# Altium PCB PCB1.pcbdoc
Units mil, origin at the board's own origin, x right, y up, seen from the top; angles counter-clockwise.
Board outline 1889.76 x 1889.47 mil, 2 copper layers (Top Layer, Bottom Layer); 3 components, 11 nets, 10 pads, 30 vias.
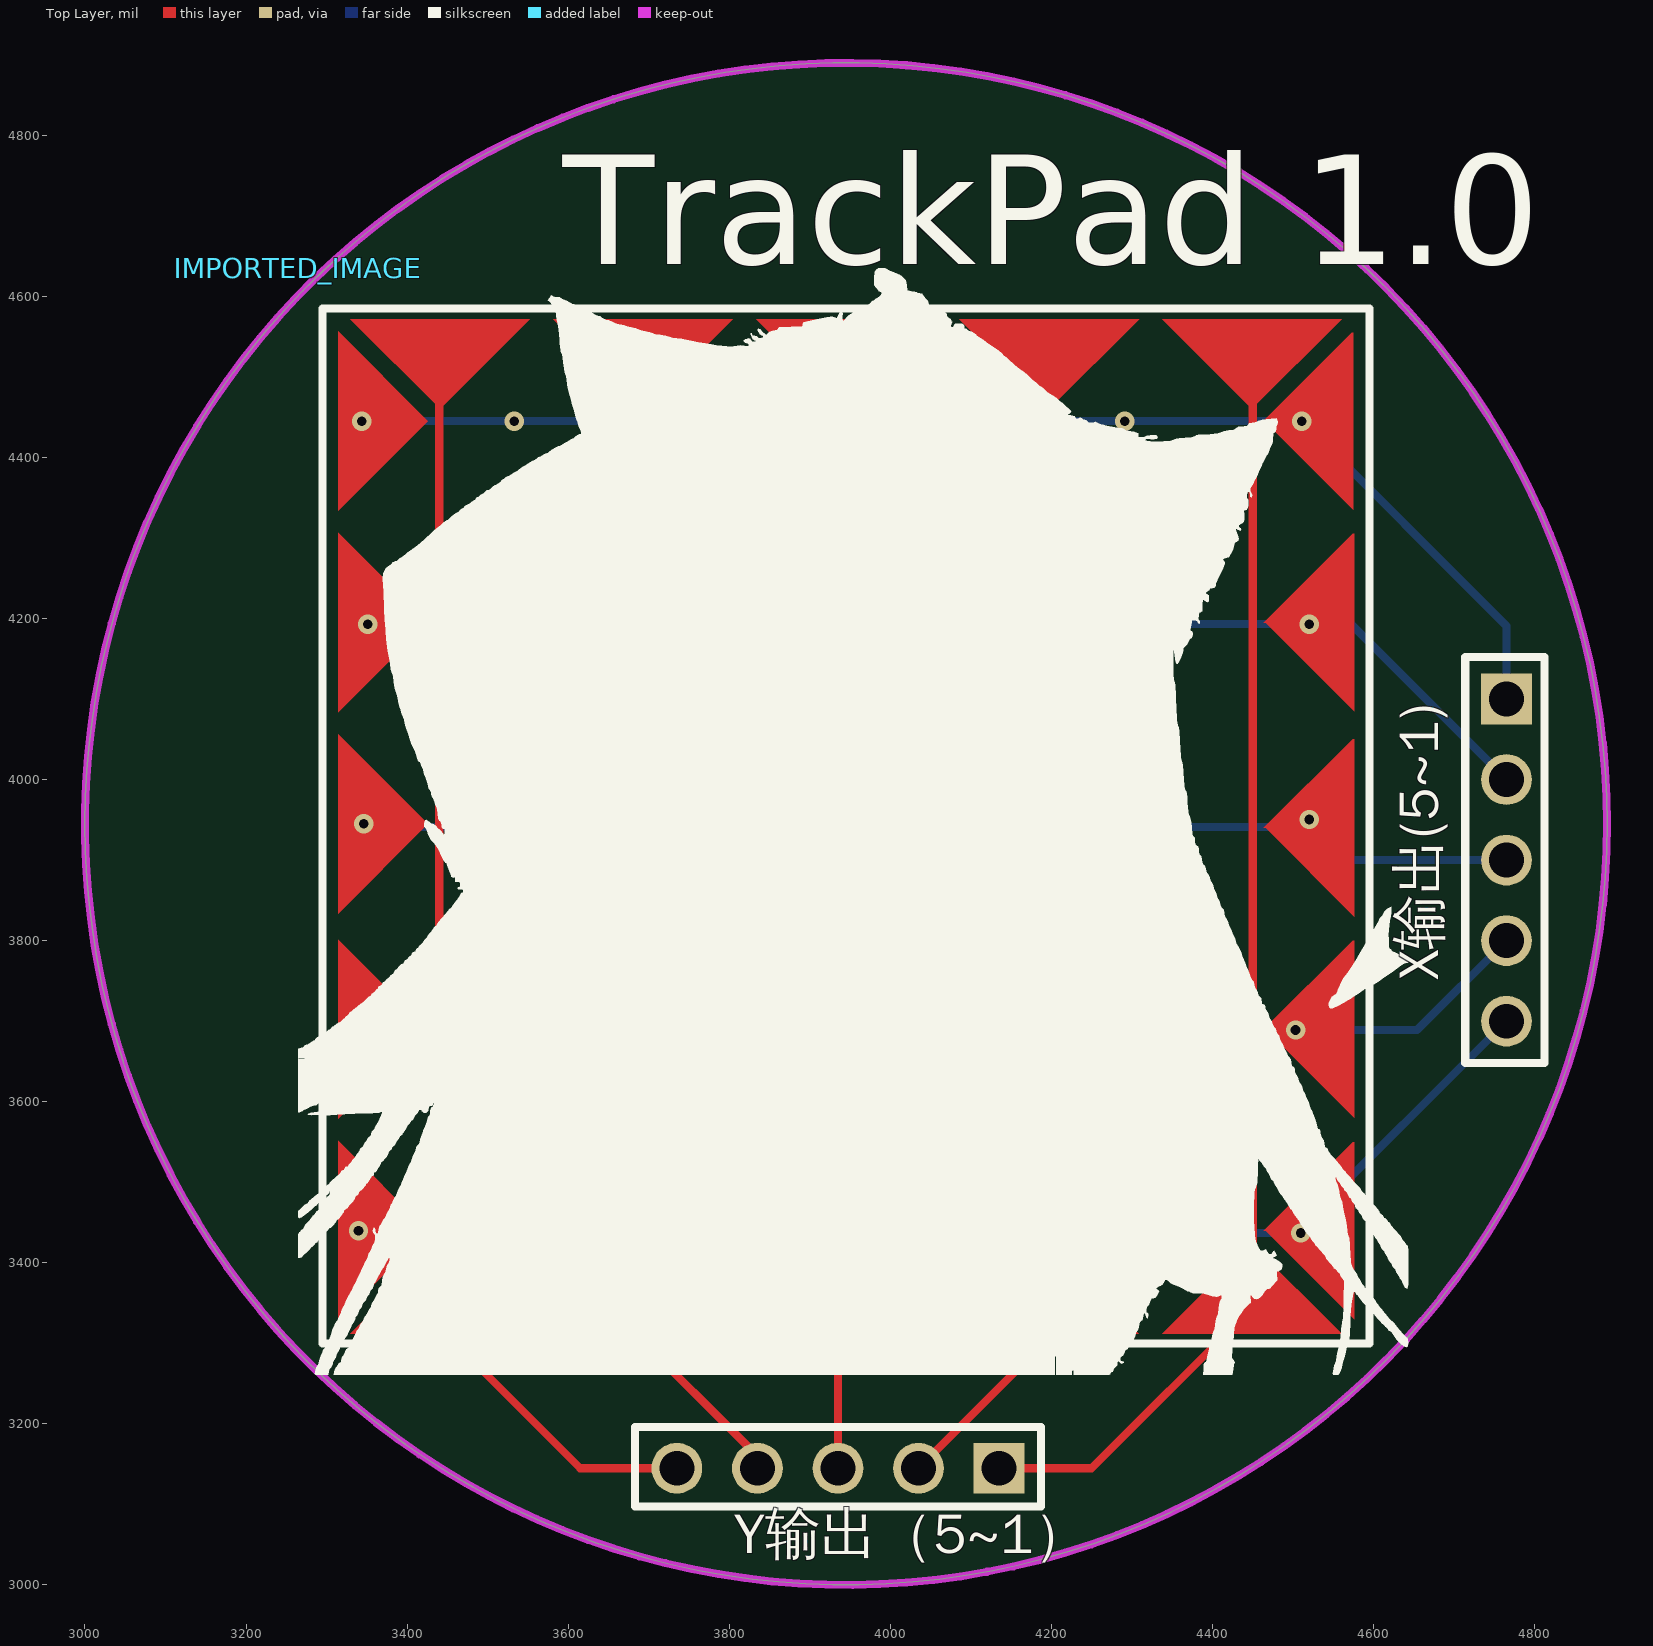
[diagram p0: Top Layer view]
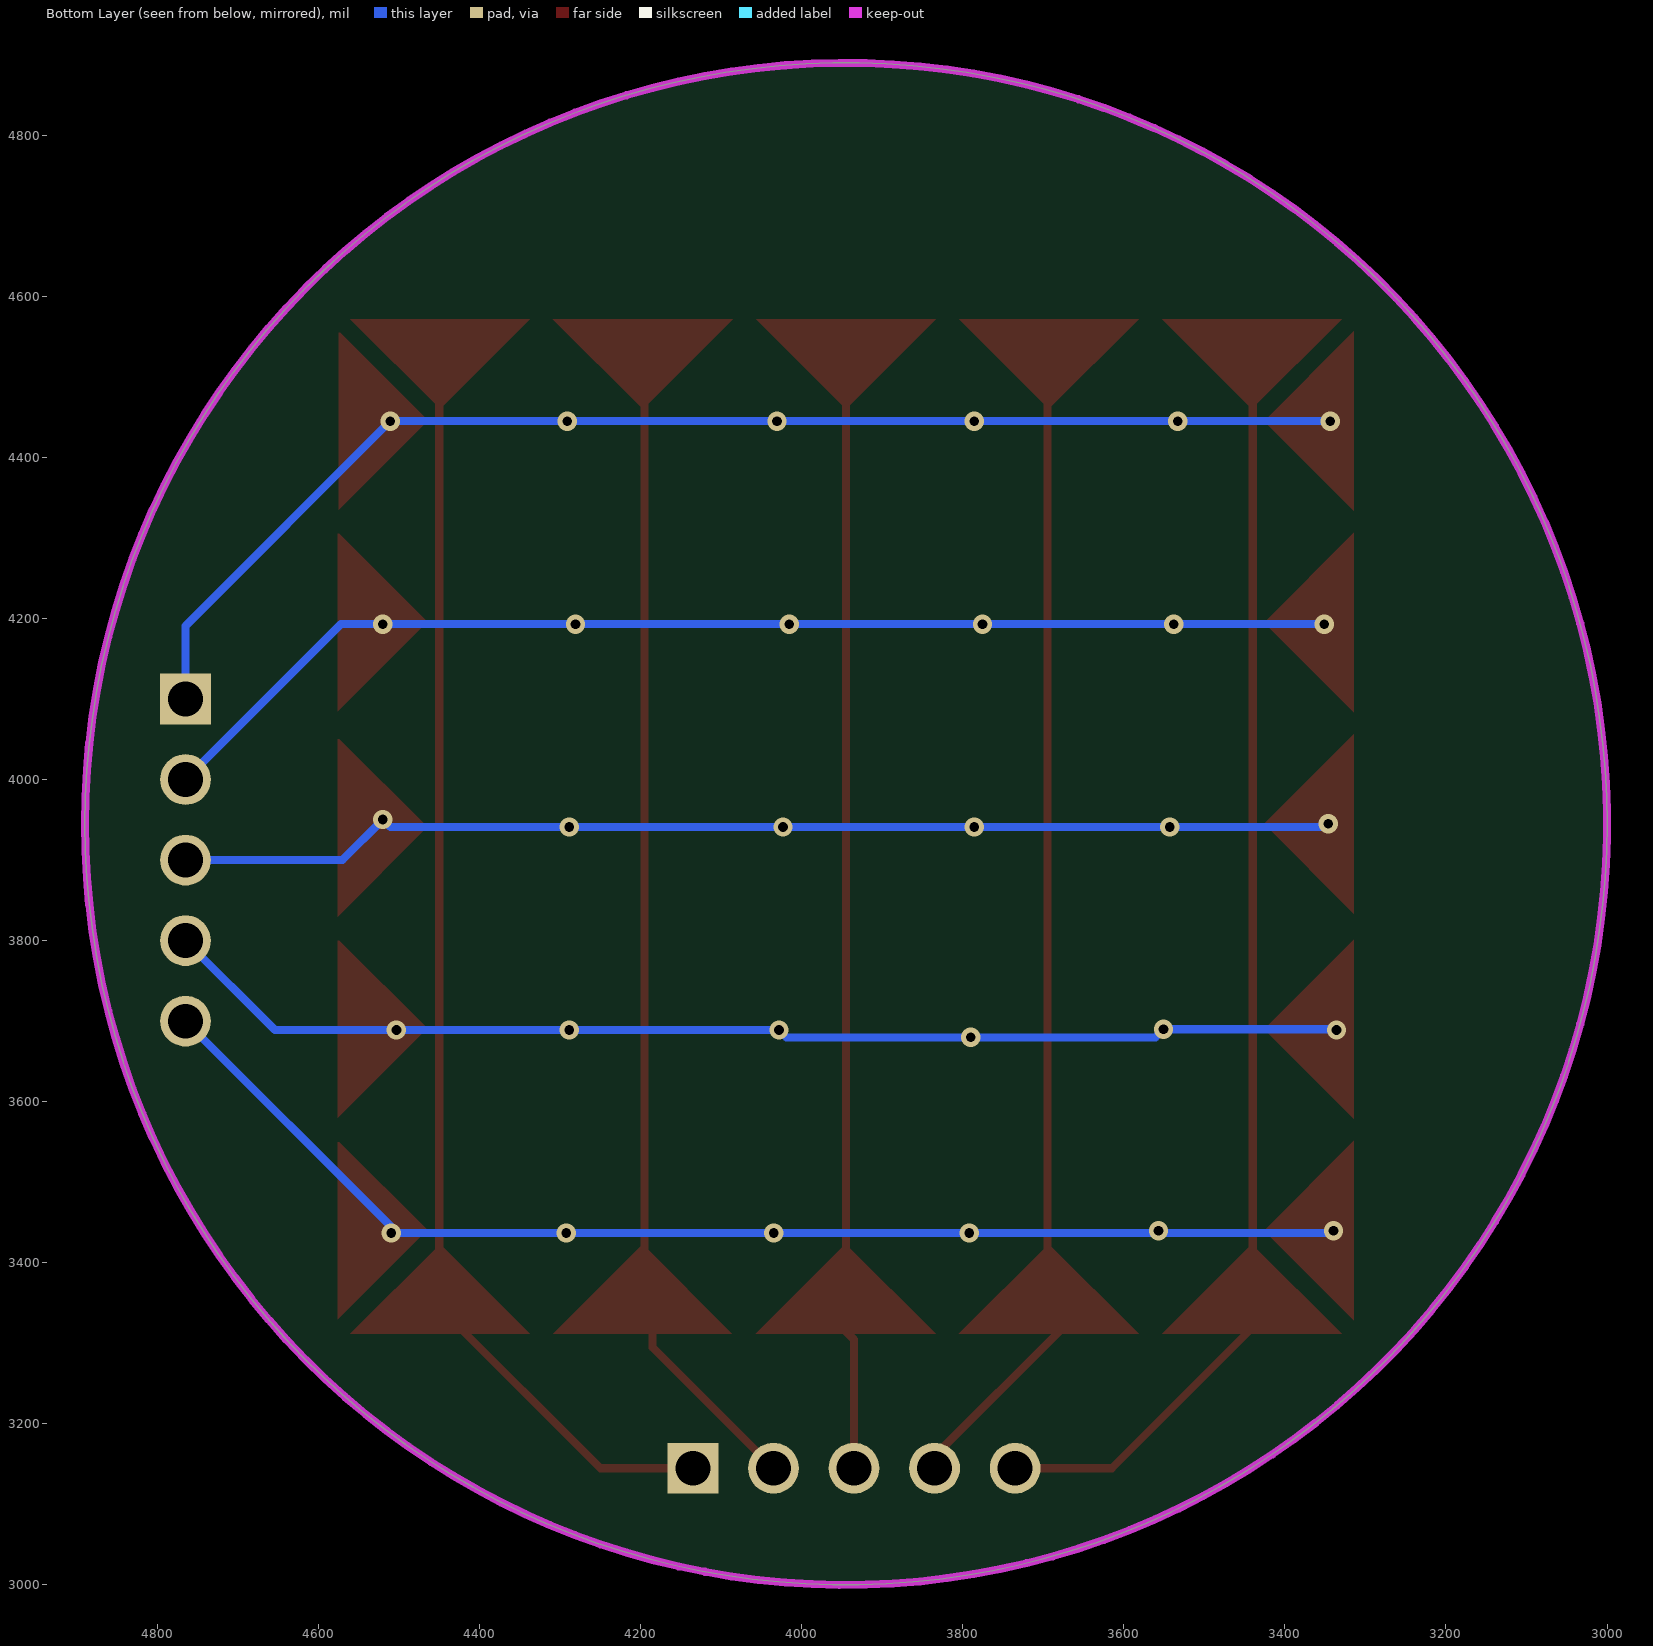
[diagram p1: Bottom Layer view, seen from below]

## Layer stack, top to bottom
Top Layer: signal copper (thickness not stored)
Dielectric: dielectric 12.6, FR-4, Dk 4.8
Bottom Layer: signal copper (thickness not stored)

## Board outline
4889.76,3944.88 ccw(c3944.88,3944.88) 3000,3944.88 ccw(c3944.88,3944.88)

## Components (designator, comment, footprint, x,y, rotation, side; value= is the part's Value field where it differs from the comment)
IMPORTED_IMAGE "IMPORTED_IMAGE" IMPORTED_IMAGE 3264.88,4634.88 r0 top
X输出(5~1) "双塑单排排针5PIN2.54间距" HDR-TH_5P-P2.54-V-M-A 4764.88,3899.88 r270 top
Y输出（5~1） "双塑单排排针5PIN2.54间距" HDR-TH_5P-P2.54-V-M-A 3934.88,3144.88 r180 top

## Footprints (in the part's own frame and the unit in brackets; to place one, negate y for a bottom-side part, rotate by r counter-clockwise, add the part's x,y. Pads: shape width x height; smd on the part's side, far side on the other; paste and mask are expansions set on the pad)
HDR-TH_5P-P2.54-V-M-A [mm]
  rect 1.6x1.6 hole 1.1: 1(-5.08,0)
  round 1.6 hole 1.1: 2(-2.54,0) 3(0,0) 4(2.54,0) 5(5.08,0)
  silkscreen extent -6.4,-1.3 6.4,1.2
IMPORTED_IMAGE [mil]
  silkscreen extent 0,-1374 1378,0

## Via types
v1: diameter 24.02, hole 12.01, Top Layer to Bottom Layer, 30 vias

## Nets (pads, with @x,y where several pads share a name; then routed paths per layer and width w, separated by ;. In a path a pad name is that pad's centre, name@x,y a point inside that pad or via, vN(x,y) a via of type N, cw(c..) or ccw(c..) an arc to the next point about the centre after c; other vN are vias at no path point)
BOT_OUT1: Y输出（5~1）.1 | length 1485.8
  Top Layer w10: Y输出（5~1）.1 4249.88,3144.88 4444.88,3339.88 ; 4449.88,3384.88 4449.88,4479.88
BOT_OUT2: Y输出（5~1）.2 | length 1332.1
  Top Layer w10: Y输出（5~1）.2 4184.88,3294.88 4184.88,3339.88 ; 4194.88,3399.88 4194.88,4474.88
BOT_OUT3: Y输出（5~1）.3 | length 1305.4
  Top Layer w10: Y输出（5~1）.3 3934.88,3304.88 3954.88,3324.88 ; 3939.88,3359.88 3944.88,3364.88 3944.88,4474.88
BOT_OUT4: Y输出（5~1）.4 | length 1323.3
  Top Layer w10: 3674.88,3319.88 3834.88,3159.88 Y输出（5~1）.4 ; 3689.88,3404.88 3694.88,3409.88 3694.88,4484.88
BOT_OUT5: Y输出（5~1）.5 | length 1479.6
  Top Layer w10: 3434.88,3324.88 3614.88,3144.88 Y输出（5~1）.5 ; 3439.88,3384.88 3439.88,4489.88
TOP_OUT1: X输出(5~1).1 | length 1617.4
  Bottom Layer w10: v1(3343.51,4444.88) v1(3532.97,4444.88) v1(3785.6,4444.88) v1(4030.64,4444.88) v1(4290.85,4444.88) v1(4510.63,4444.88) 4764.88,4190.63 4764.88,4099.88
TOP_OUT2: X输出(5~1).2 | length 1493.8
  Bottom Layer w10: v1(3351.09,4192.91) v1(3538.03,4192.91) v1(3775.49,4192.91) v1(4015.49,4192.91) v1(4280.74,4192.91) v1(4519.88,4192.91) 4571.85,4192.91 4764.88,3999.88
TOP_OUT3: X输出(5~1).3 | length 1445.2
  Bottom Layer w10: v1(3346.03,3944.88) 3349.97,3940.94 v1(3543.08,3940.94) v1(3785.6,3940.94) v1(4023.07,3940.94) v1(4288.32,3940.94) 4510.56,3940.94 v1(4519.88,3950.26) 4570.26,3899.88 4764.88,3899.88
TOP_OUT4: X输出(5~1).4 | length 1483.2
  Bottom Layer w10: v1(3335.93,3688.98) 3336.83,3689.88 v1(3550.66,3689.88) 3560.66,3679.88 v1(3789.88,3679.88) 4019.02,3679.88 v1(4028.12,3688.98) v1(4288.32,3688.98) v1(4503.05,3688.98) 4653.98,3688.98 4764.88,3799.88
TOP_OUT5: X输出(5~1).5 | length 1539.6
  Bottom Layer w10: v1(3339.72,3439.88) 3342.59,3437.01 v1(3791.91,3437.01) v1(4034.43,3437.01) v1(4292.11,3437.01) v1(4509.37,3437.01) 4509.37,3444.37 4764.88,3699.88
  other v1: 3556.97,3439.88
"": 

## Keep-outs
Board Outline Layer:
  circle w10 net "": c3944.88,3944.88 r944.88

## Other copper
Top Layer:
  region net TOP_OUT2: 3454.88,4192.91 3677.59,4192.91 3454.88,4192.91
  region net TOP_OUT2: 3706.85,4192.91 3929.56,4192.91 3706.85,4192.91
  region net TOP_OUT2: 3958.82,4192.91 4181.53,4192.91 3958.82,4192.91
  region net TOP_OUT2: 4210.79,4192.91 4433.5,4192.91 4210.79,4192.91
  region net TOP_OUT3: 3454.88,3940.94 3677.59,3940.94 3454.88,3940.94
  region net TOP_OUT3: 3706.85,3940.94 3929.56,3940.94 3706.85,3940.94
  region net TOP_OUT3: 3958.82,3940.94 4181.53,3940.94 3958.82,3940.94
  region net TOP_OUT3: 4210.79,3940.94 4433.5,3940.94 4210.79,3940.94
  region net TOP_OUT4: 3454.88,3688.98 3677.59,3688.98 3454.88,3688.98
  region net TOP_OUT4: 3706.85,3688.98 3929.56,3688.98 3706.85,3688.98
  region net TOP_OUT4: 3958.82,3688.98 4181.53,3688.98 3958.82,3688.98
  region net TOP_OUT4: 4210.79,3688.98 4433.5,3688.98 4210.79,3688.98
  region net TOP_OUT5: 3454.88,3437.01 3677.59,3437.01 3454.88,3437.01
  region net TOP_OUT5: 3706.85,3437.01 3929.56,3437.01 3706.85,3437.01
  region net TOP_OUT5: 3958.82,3437.01 4181.53,3437.01 3958.82,3437.01
  region net TOP_OUT5: 4210.79,3437.01 4433.5,3437.01 4210.79,3437.01
  region net BOT_OUT5: 3329.63,4319.63 3552.34,4319.63 3329.63,4319.63
  region net BOT_OUT4: 3581.59,4319.63 3804.31,4319.63 3581.59,4319.63
  region net BOT_OUT3: 3833.56,4319.63 4056.27,4319.63 3833.56,4319.63
  region net BOT_OUT2: 4085.53,4319.63 4308.24,4319.63 4085.53,4319.63
  region net BOT_OUT1: 4337.5,4319.63 4560.21,4319.63 4337.5,4319.63
  region net BOT_OUT5: 3329.63,4067.66 3552.34,4067.66 3329.63,4067.66
  region net BOT_OUT4: 3581.59,4067.66 3804.31,4067.66 3581.59,4067.66
  region net BOT_OUT3: 3833.56,4067.66 4056.27,4067.66 3833.56,4067.66
  region net BOT_OUT2: 4085.53,4067.66 4308.24,4067.66 4085.53,4067.66
  region net BOT_OUT1: 4337.5,4067.66 4560.21,4067.66 4337.5,4067.66
  region net BOT_OUT5: 3329.63,3815.69 3552.34,3815.69 3329.63,3815.69
  region net BOT_OUT4: 3581.59,3815.69 3804.31,3815.69 3581.59,3815.69
  region net BOT_OUT3: 3833.56,3815.69 4056.27,3815.69 3833.56,3815.69
  region net BOT_OUT2: 4085.53,3815.69 4308.24,3815.69 4085.53,3815.69
  region net BOT_OUT1: 4337.5,3815.69 4560.21,3815.69 4337.5,3815.69
  region net BOT_OUT5: 3329.63,3563.72 3552.34,3563.72 3329.63,3563.72
  region net BOT_OUT4: 3581.59,3563.72 3804.31,3563.72 3581.59,3563.72
  region net BOT_OUT3: 3833.56,3563.72 4056.27,3563.72 3833.56,3563.72
  region net BOT_OUT2: 4085.53,3563.72 4308.24,3563.72 4085.53,3563.72
  region net BOT_OUT1: 4337.5,3563.72 4560.21,3563.72 4337.5,3563.72
  region net TOP_OUT1: 3454.88,4444.88 3677.59,4444.88 3454.88,4444.88
  region net TOP_OUT1: 3706.85,4444.88 3929.56,4444.88 3706.85,4444.88
  region net TOP_OUT1: 3958.82,4444.88 4181.53,4444.88 3958.82,4444.88
  region net TOP_OUT1: 4210.79,4444.88 4433.5,4444.88 4210.79,4444.88
  region net TOP_OUT1: 4574.88,4554.88 4574.88,4334.88 4464.88,4444.88 4462.76,4444.88 4572.76,4554.88
  region net TOP_OUT2: 4575.94,4304.88 4575.94,4084.88 4465.94,4194.88 4463.82,4194.88 4573.82,4304.88
  region net TOP_OUT3: 4575.94,4049.88 4575.94,3829.88 4465.94,3939.88 4463.82,3939.88 4573.82,4049.88
  region net TOP_OUT4: 4575.94,3799.88 4575.94,3579.88 4465.94,3689.88 4463.82,3689.88 4573.82,3799.88
  region net TOP_OUT5: 4575.94,3549.88 4575.94,3329.88 4465.94,3439.88 4463.82,3439.88 4573.82,3549.88
  region net TOP_OUT1: 3425.62,4444.88 3314.27,4333.53 3314.27,4556.24
  region net TOP_OUT2: 3425.56,4194.88 3314.2,4083.53 3314.2,4306.24
  region net TOP_OUT3: 3425.56,3944.88 3314.2,3833.53 3314.2,4056.24
  region net TOP_OUT4: 3425.56,3689.88 3314.2,3578.53 3314.2,3801.24
  region net TOP_OUT5: 3425.56,3439.88 3314.2,3328.53 3314.2,3551.24
  region net BOT_OUT5: 3440.98,3423.11 3329.63,3311.75 3552.34,3311.75
  region net BOT_OUT4: 3692.95,3423.11 3581.59,3311.75 3804.72,3311.75 3693.37,3423.11
  region net BOT_OUT3: 3944.92,3423.11 3833.56,3311.75 4056.87,3311.75 3945.51,3423.11
  region net BOT_OUT2: 4196.89,3422.07 4086.57,3311.75 4308.3,3311.75 4197.98,3422.07
  region net BOT_OUT1: 4448.86,3423.11 4337.5,3311.75 4560.21,3311.75
  region net BOT_OUT5: 3329.63,4571.59 3440.98,4460.24 3552.34,4571.59
  region net BOT_OUT4: 3581.59,4571.59 3692.95,4460.24 3804.31,4571.59
  region net BOT_OUT3: 3833.56,4571.59 4056.27,4571.59 3944.88,4460.2 3944.88,4459.88 3833.56,4571.2
  region net BOT_OUT2: 4085.53,4571.59 4308.8,4571.59 4197.44,4460.24 4196.89,4460.24
  region net BOT_OUT1: 4337.5,4571.59 4448.86,4460.24 4560.21,4571.59

## Silkscreen, mask and mechanical layers (free items; w line width, h text height)
Top Silkscreen Layer:
  lines w10 net "": 3294.88,3299.88 4594.88,3299.88 4594.88,4584.88 3294.88,4584.88 3294.88,3299.88
  text "TrackPad 1.0" at 3593.08,4639.96 h135.94